# EAGLE board HeaderBoard2.2 (EAGLE 9.1.3)
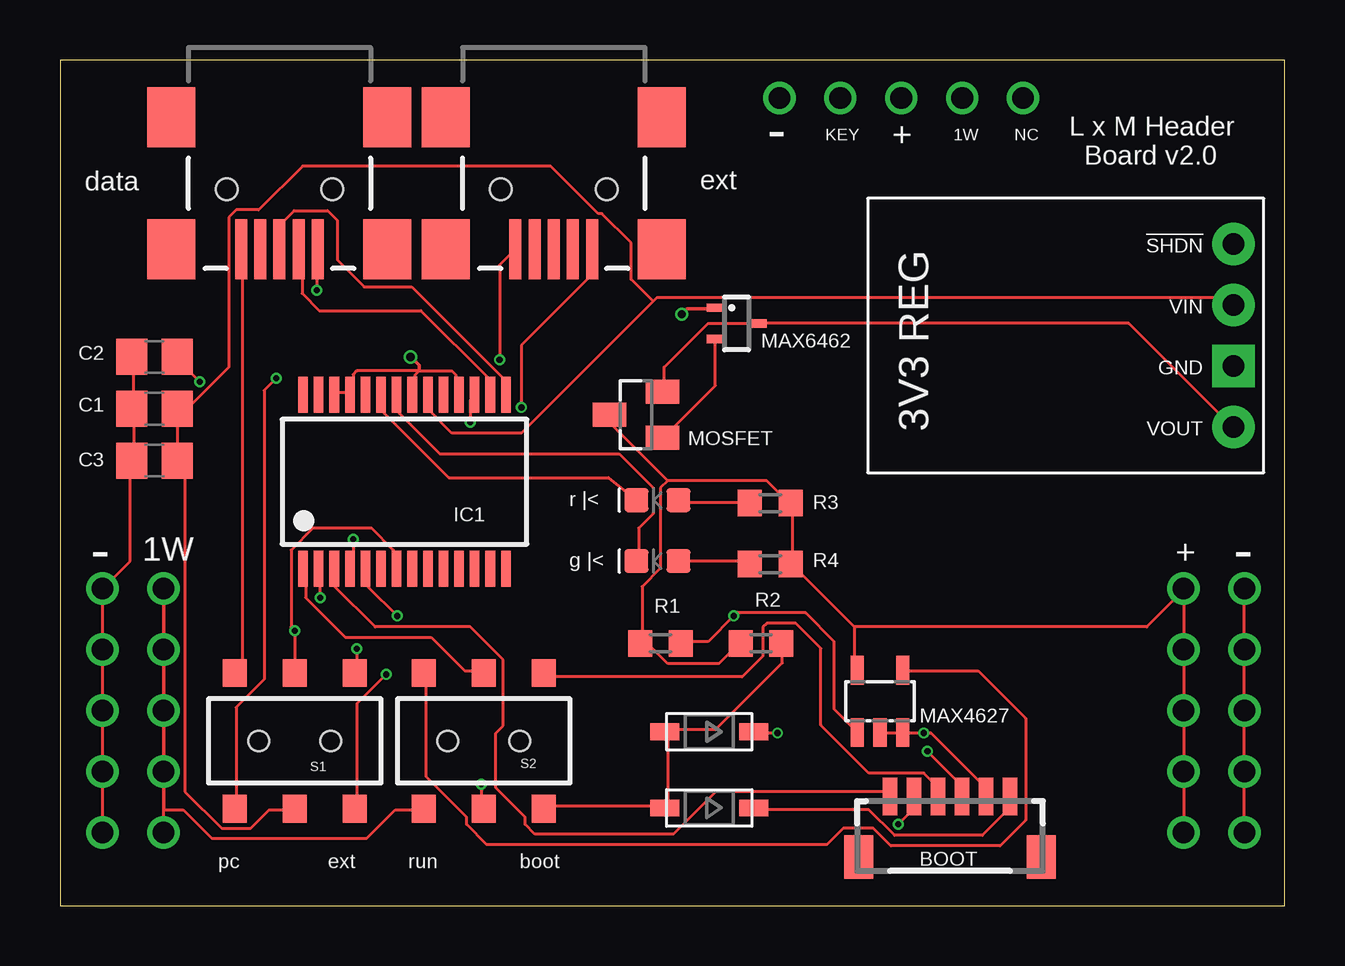
[diagram p0: board, top side]
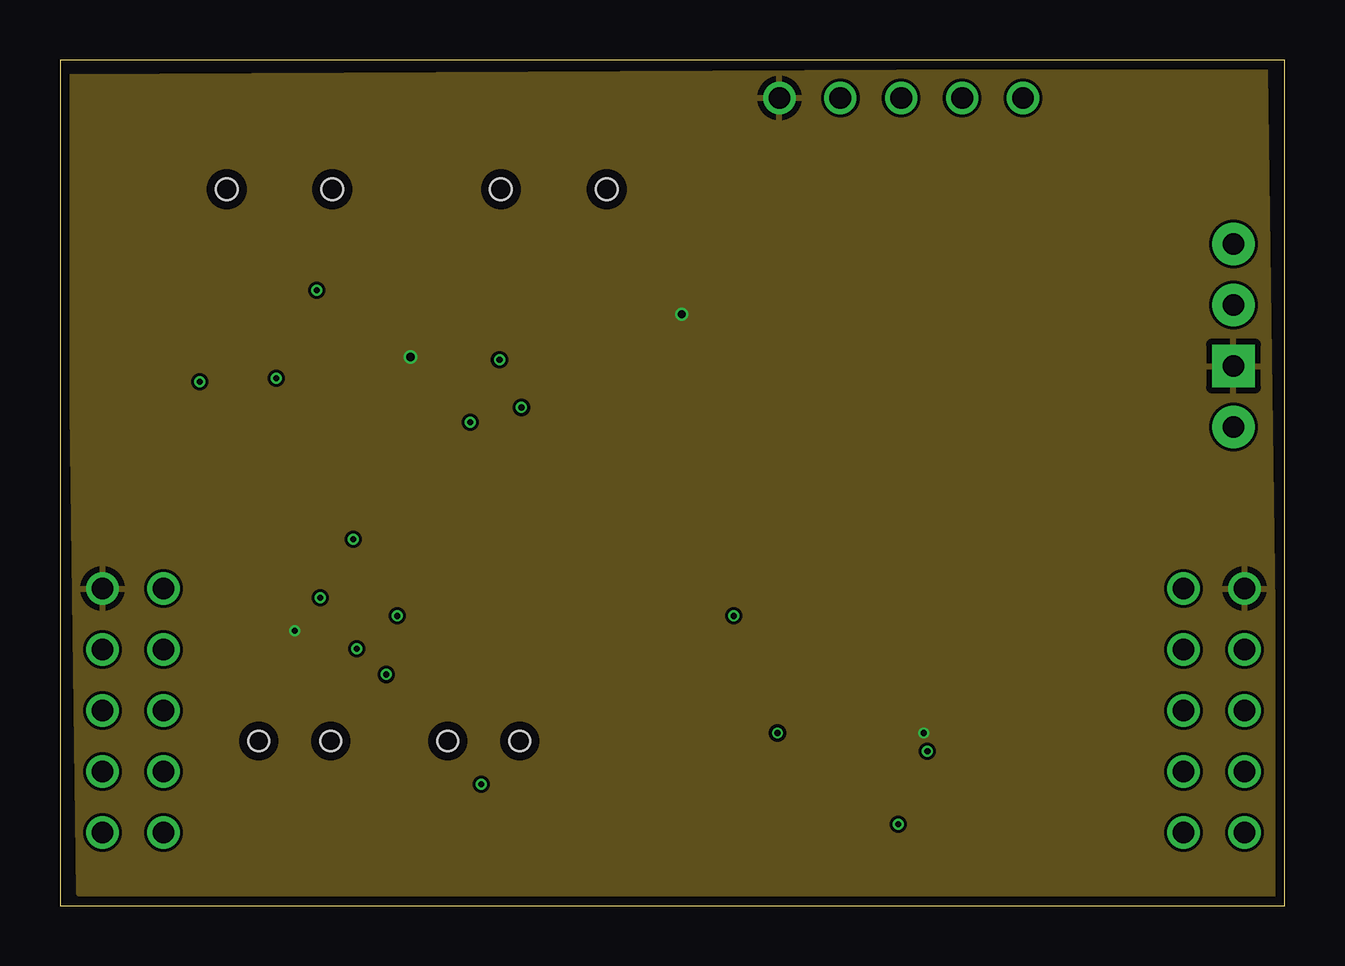
[diagram p1: board, inner layer GND]
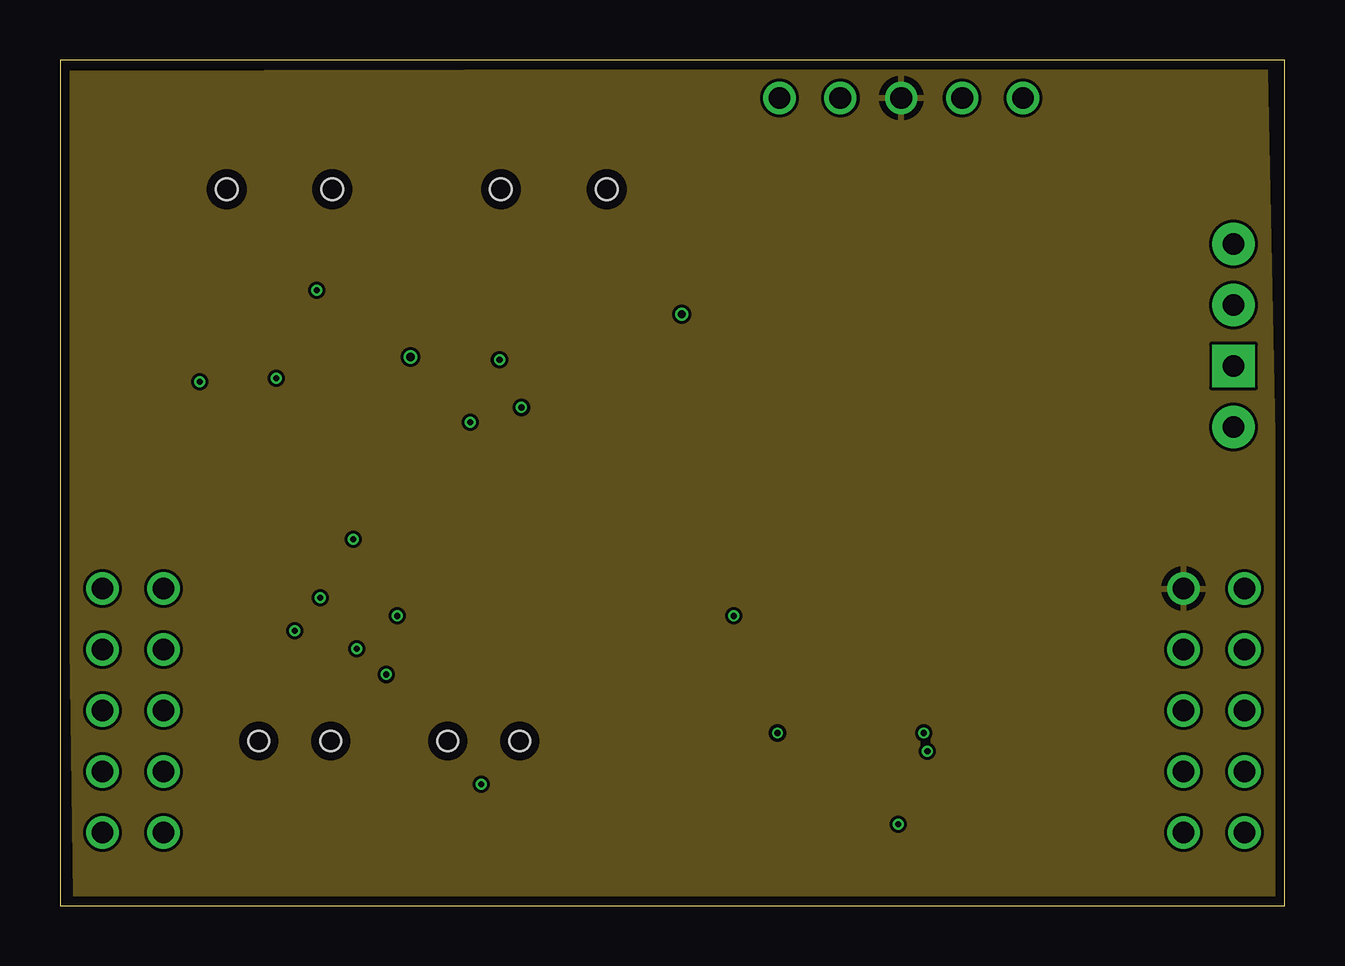
[diagram p2: board, inner layer +3V3]
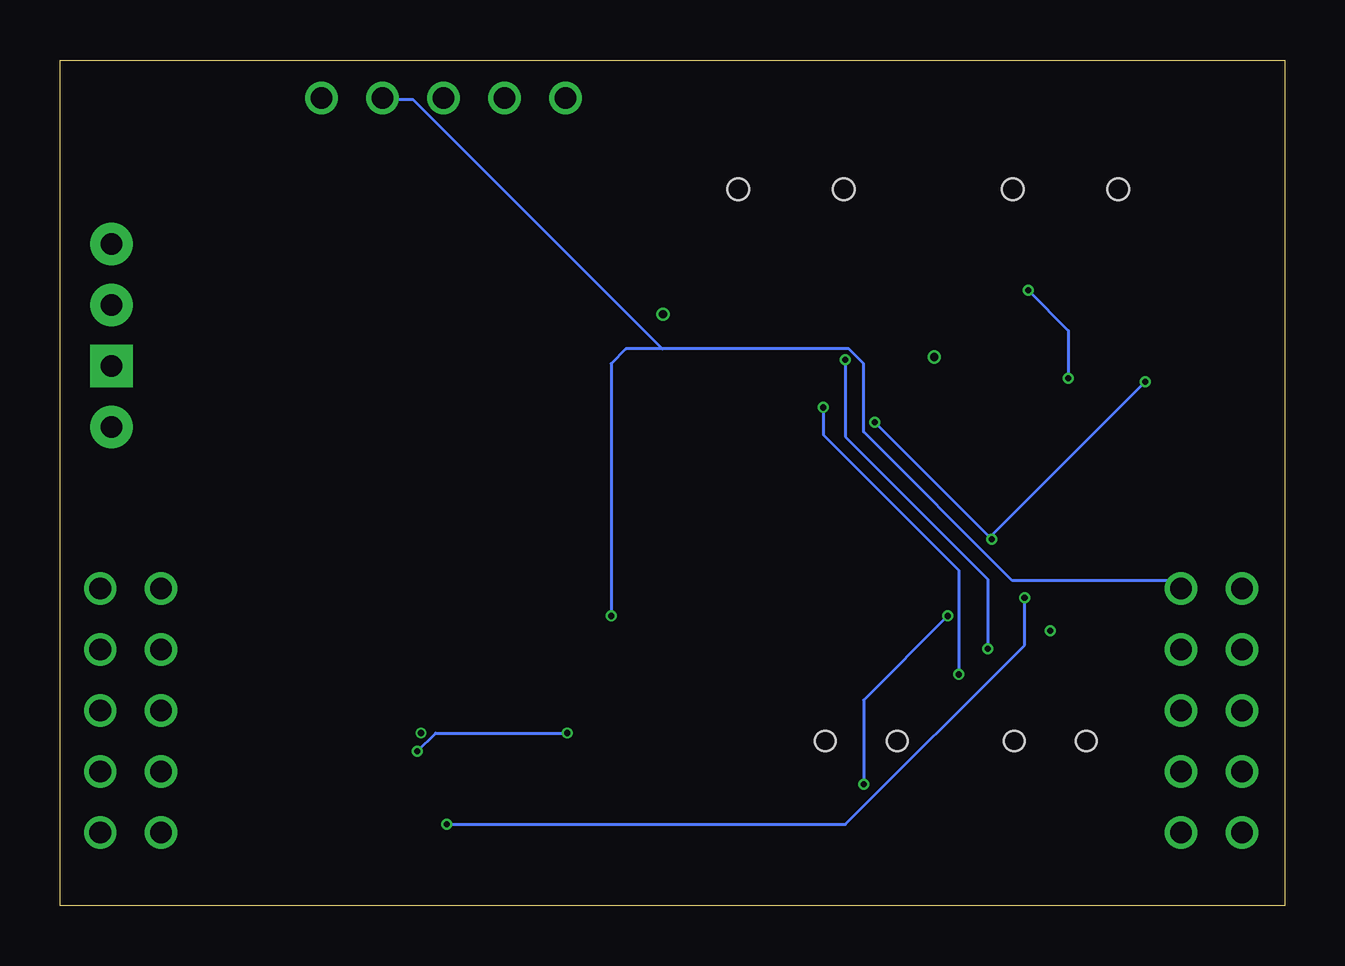
[diagram p3: board, bottom side, seen from below]

Size 51.03 x 35.23 mm. Coordinates in mm from the lower left corner, seen from the top.
Outline: 0,0 51.03,0 51.03,35.23 0,35.23 0,0
Copper layers (1*2*15*16): Top 0.035559375mm / dielectric 0.17018125mm / GND 0.01778125mm / dielectric 47mil / +3V3 0.01778125mm / dielectric 0.17018125mm / Bottom 0.035559375mm
Design rules "oshpark-4layer": minimum track width 5mil, minimum drill 10mil, track to track 5mil, track to pad 5mil, pad to pad 5mil, via to via 5mil, smd to smd 5mil, copper to edge 15mil, drill to drill 6mil, minimum pad ring 4mil, minimum via ring 4mil, stop-mask expansion 2.5mil, vias tented up to drill 0mil, thermal gap 10mil

## Footprints (pad centres in the part's own frame; a part is rotated, then mirrored left to right if it is on the bottom)
BM06B-SRSS-TB = smd 0.6 x 1.55: 1 2.5,-1.625; 2 1.5,-1.625; 3 0.5,-1.625; 4 -0.5,-1.625; 5 -1.5,-1.625; 6 -2.5,-1.625 | smd 1.2 x 1.8: FIT@1 3.8,0.9; FIT@2 -3.8,0.9
C0805 = smd 1.3 x 1.5: 1 -0.95,0; 2 0.95,0
SOD-123 = smd 1.2 x 0.7: A 1.85,0; C -1.85,0
LED-0603 = smd 1 x 1: A -0.877,0; C 0.877,0
USB-MINIB = smd 2.5 x 0.5: D+ 2.5,0; D- 2.5,0.8; GND 2.5,-1.6; ID 2.5,-0.8; VBUS 2.5,1.6 | smd 2.5 x 2: S1 -3,4.5; S2 2.5,4.5; S3 -3,-4.5; S4 2.5,-4.5 | hole 0.9: 0,2.2; 0,-2.2
SSOP28 = smd 0.4 x 1.5: 1 -4.225,-3.625; 2 -3.575,-3.625; 3 -2.925,-3.625; 4 -2.275,-3.625; 5 -1.625,-3.625; 6 -0.975,-3.625; 7 -0.325,-3.625; 8 0.325,-3.625; 9 0.975,-3.625; 10 1.625,-3.625; 11 2.275,-3.625; 12 2.925,-3.625; 13 3.575,-3.625; 14 4.225,-3.625; 15 4.225,3.625; 16 3.575,3.625; 17 2.925,3.625; 18 2.275,3.625; 19 1.625,3.625; 20 0.975,3.625; 21 0.325,3.625; 22 -0.325,3.625; 23 -0.975,3.625; 24 -1.625,3.625; 25 -2.275,3.625; 26 -2.925,3.625; 27 -3.575,3.625; 28 -4.225,3.625
3V3_VOLTAGE_REGULATOR = drill 0.9 pad 1.778: !SHDN! 5.715,-6.35; VIN 3.175,-6.35; VOUT -1.905,-6.35 | drill 0.9 pad 1.778 square: GND 0.635,-6.35
MAX4627 = smd 0.55 x 1.2: COM -0.95,-1.3; GND 0.95,-1.3; IN 0.95,1.3; NC 0,-1.3; V+ -0.95,1.3
SC70-3L = smd 0.35 x 0.8: 1 -0.65,-0.85; 2 0.65,-0.85; 3 0,0.85
SOT23 = smd 1 x 1.4: D 0,1.1; G -0.95,-1.1; S 0.95,-1.1
R0603 = smd 1 x 1.1: 1 -0.85,0; 2 0.85,0
SWITCH_DPDT_SMD_AYZ0202 = smd 1 x 1.15: 1 -2.5,2.825; 2 0,2.825; 3 2.5,2.825; 4 -2.5,-2.825; 5 0,-2.825; 6 2.5,-2.825 | hole 0.85: 1.5,0; -1.5,0
BBHEADERPINS_5R = drill 0.9: 1W 0,10.16; 3V3 42.5,10.16; GL -2.54,10.16; GR 45.04,10.16; P$1 -2.54,0; P$2 -2.54,2.54; P$3 -2.54,5.08; P$4 -2.54,7.62; P$6 0,0; P$7 0,2.54; P$8 0,5.08; P$9 0,7.62; P$11 42.5,0; P$12 42.5,2.54; P$13 42.5,5.08; P$14 42.5,7.62; P$16 45.04,0; P$17 45.04,2.54; P$18 45.04,5.08; P$19 45.04,7.62
PCBOARD_PINS = drill 0.9: 1W 0,-2.54; GND 0,5.08; KEY 0,2.54; NC 0,-5.08; VCC 0,0

## Placement (x,y rotation side)
BOOT  BM06B-SRSS-TB  [BM06B-SRSS-TB]  37.08,2.92 180 top
C1  10µF  [C0805]  3.94,20.7 180 top
C2  1µF  [C0805]  3.94,18.54 180 top
C3  0.1 uF  [C0805]  3.94,22.86 180 top
D1  [SOD-123]  27.05,7.24 180 top
D2  [SOD-123]  27.05,4.06 180 top
D3  GREEN  [LED-0603]  24.89,14.35 180 top
D4  RED  [LED-0603]  24.89,16.89 180 top
DAT  USB_MINI-B_SMT  [USB-MINIB]  9.14,29.85 270 top
IC1  FT232RL  [SSOP28]  14.35,17.65 0 top
J_REG_3V3_1  3V3_VOLTAGE_REGULATOR  [3V3_VOLTAGE_REGULATOR]  42.55,21.84 90 top
MAX4627  MAX4627  [MAX4627]  34.16,8.51 0 top
MAX6462  MAX6461  [SC70-3L]  28.19,24.26 270 top
MOSFET  SSM3J338R  [SOT23]  24,20.45 90 top
POW  USB_MINI-B_SMT  [USB-MINIB]  20.57,29.85 270 top
R1  10 kOhms  [R0603]  25.02,10.92 0 top
R2  10 kOhms  [R0603]  29.21,10.92 0 top
R3  1 kOhms  [R0603]  29.59,16.76 0 top
R4  1 kOhms  [R0603]  29.59,14.22 0 top
S1  [SWITCH_DPDT_SMD_AYZ0202]  9.78,6.86 0 top
S2  [SWITCH_DPDT_SMD_AYZ0202]  17.65,6.86 0 top
U$3  BBHEADERPINS_5R  [BBHEADERPINS_5R]  4.32,3.05 0 top
U$4  PCBOARD_PINS  [PCBOARD_PINS]  35.05,33.65 90 top

## Library data of the parts
BOOT = con-jst2
C1-C3 R1-R4 = rcl
D1 D2 = adafruit
D3 = SparkFun-LED; PROD_ID: DIO-00821
D4 = SparkFun-LED; PROD_ID: DIO-00819
DAT POW = SparkFun-Connectors; PROD_ID: CONN-08193; SF_ID: PRT-00587
IC1 = ftdichip; MPN: FT232RL; OC_FARNELL: 1146032; OC_NEWARK: 91K9918
J_REG_3V3_1 = Pololu Voltage Regulators
MAX4627 MOSFET U$3 U$4 = lbym
MAX6462 = maxim
S1 S2 = SparkFun-Switches; PROD_ID: SWCH-08179; SF_SKU: COM-00597

## Nets
1-WIRE: MAX4627.COM R1.2 S2.4 U$3.1W U$4.1W
+3V3: MAX4627.V+ MOSFET.D R1.1 R2.1 R3.2 R4.2 U$3.3V3 U$4.VCC
GND: BOOT.5 C1.2 C2.2 C3.2 IC1.7 IC1.18 IC1.21 IC1.25 IC1.26 J_REG_3V3_1.GND MAX4627.GND MAX4627.NC MAX6462.1 S1.2 U$3.GL U$3.GR U$4.GND
JST-1: BOOT.1 IC1.3
JST-2: BOOT.2 IC1.2
JST-3: BOOT.3 S2.3
JST-23: D1.A D2.A R2.2 S2.6
KEY: U$4.KEY
N$1: D3.C IC1.22
N$2: IC1.1 S2.2
N$3: IC1.5 S2.5
N$4: BOOT.6 D2.C
N$5: DAT.VBUS S1.4
N$6: DAT.GND S1.1
N$7: POW.GND S1.3
N$8: POW.VBUS S1.6
N$9: BOOT.4 D1.C
N$10: MAX4627.IN S2.1
N$11: J_REG_3V3_1.VOUT MAX6462.3 MOSFET.S
N$12: MAX6462.2 MOSFET.G
N$14: DAT.D+ IC1.15
N$15: DAT.D- IC1.16
N$16: C3.1 IC1.4 IC1.17
N$17: D3.A R4.1
N$18: D4.A R3.1
N$21: D4.C IC1.23
V+: C1.1 C2.1 IC1.20 J_REG_3V3_1.VIN S1.5

## Tracks (layer width: path | path; a pad name or v marks a point on that pad's centre or on a via)
1-WIRE  (via drill 0.25)
  Top 0.127: R1.2 25.93,11 27,11 v28.07,12.06 28.19,12.19 31.06,12.19 32.26,11 32.26,8.18 33.1,7.34 MAX4627.COM | 4.32,3.99 5.13,3.99 6.33,2.79 12.78,2.79 13.97,3.99 15.11,3.99 S2.4
  Top 0.152: U$3.1W 4.32,3.99
  Bottom 0.127: 25.93,23.19 36.32,33.58 37.54,33.58 U$4.1W | 25.93,23.19 27.46,23.19 28.07,22.58 v28.07,12.06 | U$3.1W 4.87,13.54 11.35,13.54 17.55,19.74 17.55,22.58 18.16,23.19 25.93,23.19
+3V3
  Top 0.127: R2.1 28.22,10.85 27.46,10.08 25.32,10.08 24.56,10.85 24.26,10.85 R1.1 24.26,11 24.26,13.28 25.02,14.05 25.02,17.4 25.32,17.7 | 33.1,11.61 33.1,9.93 MAX4627.V+ | 33.1,11.61 30.5,14.2 R4.2 30.5,14.35 30.5,16.64 R3.2 30.35,16.79 29.44,17.7 25.32,17.7 | 25.32,17.7 23.04,19.99 23.04,20.45 MOSFET.D | 33.1,11.61 45.29,11.61 46.81,13.13 U$3.3V3
  pour +3V3: 0.66,0.38 50.93,0.38 50.23,34.78 0.18,34.65
GND  (via drill 0.25, 0.35)
  Top 0.127: S1.2 9.78,9.78 v9.78,11.45 9.63,11.61 9.63,14.81 10.54,15.72 12.06,15.72 12.98,15.72 13.89,14.81 13.89,14.05 IC1.7 | IC1.26 11.45,21.36 12.06,21.36 IC1.25 12.22,21.36 12.22,22.12 12.37,22.28 14.96,22.28 | 27.3,24.87 MAX6462.1 | 14.96,22.28 16.33,22.28 16.48,22.12 16.48,21.36 IC1.18 | 14.96,22.28 14.81,22.12 14.81,21.36 IC1.21 | MAX4627.NC 34.16,7.19 35.08,7.19 MAX4627.GND 35.23,7.19 v35.99,7.19 36.3,7.19 38.58,4.9 38.58,4.6 BOOT.5 | C3.2 3.07,22.73 3.07,20.75 C1.2 3.07,20.6 3.07,18.62 C2.2 2.92,18.47 2.92,14.35 1.85,13.28 U$3.GL
  Top 0.152: 14.96,22.28 14.96,22.5 v14.61,22.86 | v25.91,24.64 26.14,24.87 27.3,24.87
  pour GND: 0.79,0.51 50.7,0.51 50.23,34.77 0.31,34.52
JST-1
  Top 0.127: IC1.3 11.45,13.89 11.45,13.28 13.13,11.61 17.09,11.61 18.47,10.24 18.47,7.49 18.16,7.19 18.16,4.9 19.38,3.68 19.38,3.38 19.79,2.97 25.55,2.97 27.33,4.75 34.31,4.75 34.47,4.6 BOOT.1
JST-2  (via drill 0.25)
  Top 0.127: v10.85,12.83 10.85,13.89 IC1.2 | v34.92,3.38 35.53,3.99 35.53,4.45 BOOT.2
  Bottom 0.127: v10.85,12.83 10.85,10.85 18.31,3.38 v34.92,3.38
JST-3
  Top 0.127: BOOT.3 36.45,4.6 36.45,5.05 35.99,5.51 33.71,5.51 31.7,7.52 31.7,10.72 30.66,11.76 29.44,11.76 29.29,11.61 29.29,10.39 28.42,9.52 20.31,9.52 S2.3
JST-23
  Top 0.127: S2.6 20.3,4.14 25.17,4.14 D2.A 25.32,4.14 25.32,7.19 D1.A 25.32,7.34 27.33,7.34 30.1,10.11 30.1,10.88 R2.2
N$1
  Top 0.127: D3.C 24.11,14.35 24.11,15.72 24.71,16.33 24.71,17.4 23.29,18.82 15.82,18.82 14.05,20.6 14.05,21.21 IC1.22
N$2
  Top 0.127: S2.2 17.55,9.78 16.87,9.78 15.47,11.18 11.89,11.18 10.24,12.83 10.24,13.89 IC1.1
N$3  (via drill 0.25)
  Top 0.127: v17.55,5.05 17.55,4.14 S2.5 | v14.05,12.06 12.83,13.28 12.83,13.89 IC1.5
  Bottom 0.127: v17.55,5.05 17.55,8.56 v14.05,12.06
N$4
  Top 0.127: D2.C 28.98,3.99 33.71,3.99 34.77,2.92 38.43,2.92 39.5,3.99 39.5,4.45 BOOT.6
N$5  (via drill 0.25)
  Top 0.127: v10.69,25.63 10.69,27.3 DAT.VBUS | S1.4 7.34,4.14 7.34,8.26 8.51,9.42 8.51,21.46 v9.02,21.97
  Bottom 0.127: v9.02,21.97 9.02,23.95 v10.69,25.63
N$6
  Top 0.127: S1.1 7.59,10.17 7.59,27.29 DAT.GND
N$7  (via drill 0.25)
  Top 0.127: v12.37,10.69 12.37,9.78 S1.3 | v18.31,22.73 18.31,26.7 18.92,27.3 POW.GND
  Bottom 0.127: v12.37,10.69 12.37,13.59 18.31,19.53 v18.31,22.73
N$8  (via drill 0.25)
  Top 0.127: v13.59,9.63 12.37,8.41 12.37,4.14 S1.6 | v19.23,20.75 19.23,23.34 22.12,26.24 22.12,27.3 POW.VBUS
  Bottom 0.127: v13.59,9.63 13.59,13.97 19.23,19.61 v19.23,20.75
N$9  (via drill 0.25)
  Top 0.127: v29.9,7.19 28.98,7.19 D1.C | v36.14,6.43 37.52,5.05 37.52,4.6 BOOT.4
  Bottom 0.127: v29.9,7.19 35.38,7.19 v36.14,6.43
N$10
  Top 0.127: S2.1 15.27,9.63 15.27,5.36 16.94,3.68 16.94,3.38 17.78,2.54 31.95,2.54 32.64,3.23 33.88,3.23 34.62,2.49 39.17,2.49 40.23,3.56 40.23,7.8 38.25,9.78 35.23,9.78 MAX4627.IN
N$11
  Top 0.127: MOSFET.S 25.17,21.51 25.17,22.43 27,24.26 28.98,24.26 MAX6462.3 29.13,24.26 44.53,24.26 48.79,19.99 J_REG_3V3_1.VOUT
N$12
  Top 0.127: MAX6462.2 27.3,23.49 27.3,21.67 25.17,19.53 MOSFET.G
N$14
  Top 0.127: IC1.15 18.47,21.36 18.47,21.97 14.66,25.78 12.67,25.78 11.56,26.9 11.56,28.55 11.15,28.96 9.75,28.96 9.17,28.37 9.17,27.46 DAT.D+
N$15
  Top 0.127: IC1.16 17.86,21.36 17.86,21.97 15.04,24.79 10.8,24.79 10.08,25.5 10.08,27.3 DAT.D-
N$16  (via drill 0.25)
  Top 0.127: v12.22,15.27 12.22,14.05 IC1.4 | v17.09,20.14 17.09,21.06 17.25,21.21 IC1.17 | v5.82,21.82 4.9,22.73 C3.1
  Bottom 0.127: v17.09,20.14 12.37,15.42 | 12.37,15.42 v12.22,15.27 12.37,15.42 | v5.82,21.82 12.22,15.42 12.37,15.42
N$17
  Top 0.127: D3.A 25.78,14.35 28.68,14.35 R4.1
N$18
  Top 0.127: D4.A 25.78,16.79 28.68,16.79 R3.1
N$21
  Top 0.127: D4.C 22.85,17.83 16.2,17.83 13.44,20.6 13.44,21.21 IC1.23
V+
  Top 0.127: S1.5 9.78,3.99 8.71,3.99 7.95,3.23 6.73,3.23 5.21,4.75 5.21,18.16 4.9,18.47 C2.1 4.9,18.62 4.9,20.6 C1.1 4.9,20.75 5.36,20.75 7.04,22.43 7.04,28.68 7.34,28.98 8.28,28.98 10.11,30.81 20.45,30.81 22.43,28.83 22.58,28.83 23.8,27.61 23.8,26.09 24.71,25.17 | 24.71,25.17 24.87,25.32 48.49,25.32 48.79,25.02 J_REG_3V3_1.VIN | 24.71,25.17 19.23,19.69 16.33,19.69 15.42,20.6 15.42,21.21 IC1.20

## Text on the board
tNames: - | KEY | + | 1W | NC | data | L x M Header / Board v2.0 | ext | MAX6462 | C2 | C1 | MOSFET | C3 | IC1 | r |< | R3 | - | 1W | g |< | R4 | + | - | R1 | R2 | S1 | S2 | pc | ext | run | boot | BOOT